# Altium PCB Coordinator5-10.21.PcbDoc (part 2 of 2)
Units mm, origin at the board's own origin, x right, y up, seen from the top; angles counter-clockwise.
Board outline 176.26 x 127.25 mm, 2 copper layers (Top Layer, Bottom Layer); 117 components, 155 nets, 547 pads, 228 vias.
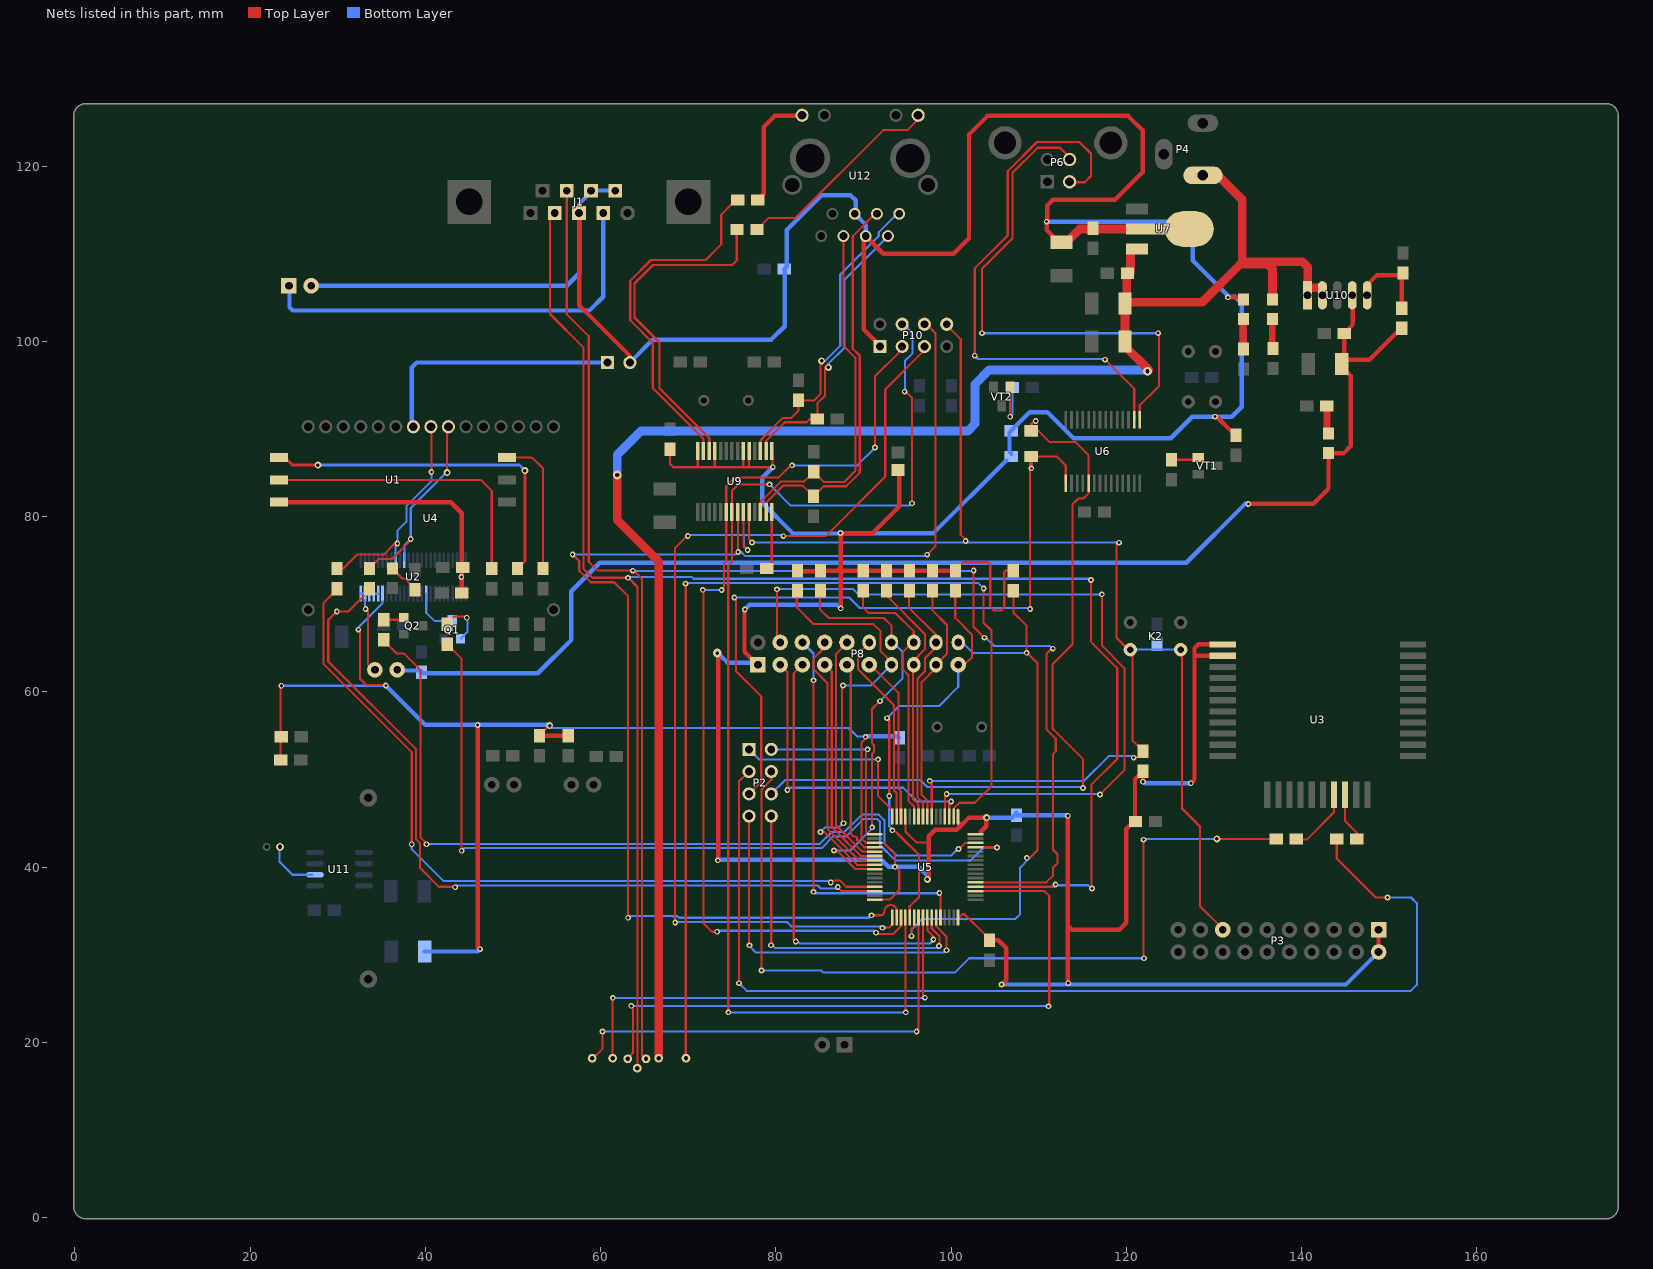
[diagram p2: the nets of this part, all layers, seen from the top]

## Via types
v1: diameter 0.65, hole 0.35, Top Layer to Bottom Layer, 208 vias
v2: diameter 0.8, hole 0.4, Top Layer to Bottom Layer, 14 vias
v3: diameter 1, hole 0.5, Top Layer to Bottom Layer, 5 vias
v4: diameter 1, hole 0.4, Top Layer to Bottom Layer, 1 vias

## Nets (pads, with @x,y where several pads share a name; then routed paths per layer and width w, separated by ;. In a path a pad name is that pad's centre, name@x,y a point inside that pad or via, vN(x,y) a via of type N, cw(c..) or ccw(c..) an arc to the next point about the centre after c; other vN are vias at no path point) (continued)
NetDS1_1: DS1.1 R15.1 | length 3.8
  Top Layer w0.24: DS1.1@36.254,74.072 37.397,72.929 37.651,72.929 38.54,72.04 38.82,72.04 R15.1@38.82,71.659
NetDS2_2: DS2.2 R26.2 | length 3.5
  Top Layer w0.762: DS2.2@136.652,102.557 136.652,99.078 R26.2@136.677,99.052
NetDS3_2: DS3.2 R24.2 | length 2.9
  Top Layer w0.762: R24.2@142.875,92.601 142.875,89.934 DS3.2@143.053,89.756
NetDS4_2: DS4.2 R25.2 | length 3.2
  Top Layer w0.762: R25.2@133.223,99.433 133.35,99.56 DS4.2@133.35,102.557
NetP1_1: P1.1 U4.24 | length 28.9
  Bottom Layer w0.5: U4.24@38.456,90.696 38.456,97.02 39.014,97.579 P1.1@60.808,97.579
NetP6_2: P6.2 U6.16 | length 62.1
  Top Layer w0.254: v1(102.692,98.367) 102.692,108.323 106.451,112.083 106.451,119.398 109.804,122.751 114.63,122.751 115.951,121.43 115.951,118.864 115.24,118.153 P6.2@113.97,118.153 ; v1@117.577,97.884 120.882,94.579 U6.16@120.882,91.065
  Bottom Layer w0.254: v1(102.692,98.367) 103.073,97.986 117.475,97.986 v1(117.551,97.909)
NetP6_3: P6.3 U6.15 | length 58.4
  Top Layer w0.254: v1(103.53,100.932) 103.53,108.273 107.01,111.752 107.01,119.238 109.871,122.099 112.411,122.099 P6.3@113.208,121.303 ; U6.15@121.532,91.065 121.532,92.695 123.723,94.887 123.723,100.83 v1(123.622,100.932)
  Bottom Layer w0.254: v1(103.53,100.932) v1(123.622,100.932)
NetQ1_2: Q1.2 R4.1 | length 5.3
  Top Layer w0.24: R4.1@42.503,67.722 42.503,67.782 43.332,68.611 v1@44.679,68.611
  Bottom Layer w0.24: Q1.2@44.027,66.071 44.044,66.071 44.806,66.833 v1@44.806,68.434
  other v1: 44.729,68.459
NetQ2_2: Q2.2 R11.1 | length 2.3
  Top Layer w0.24: R11.1@35.264,68.23 37.262,68.23 Q2.2@37.465,68.434
NetQ3_2: 
NetQ4_2: 
NetQ5_3: 
NetQ6_3: 
NetQ7_2: 
NetQ8_2: 
NetQ9_3: 
NetQ10_3: 
NetQ11_2: 
NetQ12_2: 
NetQ13_3: 
NetQ14_3: 
NetR5_1: R5.1 VT1.1 | length 3
  Top Layer w0.24: R5.1@125.147,86.493 127.788,86.493 VT1.1@128.042,86.747
NetR7_2: R7.2 U2.17 U4.23 | length 25.5
  Top Layer w0.24: R7.2@29.93,74.072 30.616,74.072 32.202,75.659 35.252,75.659 36.586,76.993 v1@36.889,76.993 ; v1(40.691,85.082) 40.691,90.442 U4.23@40.716,90.467
  Bottom Layer w0.24: U2.17@36.613,75.012 36.613,76.971 36.77,76.971 v1(36.812,76.929) 36.812,78.385 37.843,79.415 37.843,81.181 40.691,84.028 v1(40.691,85.082)
NetR9_2: R9.2 U2.15 U4.22 | length 23.8
  Top Layer w0.24: R9.2@33.359,73.818 R9.2@33.613,74.072 34.705,75.165 36.195,75.165 38.354,77.324 v1@38.354,77.476 ; v1@38.333,77.455 v1(38.337,77.451) ; v2(42.494,85.006) 42.494,90.01 U4.22@42.596,90.112
  Bottom Layer w0.24: U2.15@37.613,75.012 37.613,76.727 v1(38.337,77.451) 38.337,80.976 42.367,85.006 v2(42.494,85.006)
NetR12_2: R12.2 U3.19 | length 5.3
  Top Layer w0.24: U3.19@144.932,47.973 144.932,45.281 146.279,43.934 R12.2@146.279,43.223
NetR13_2: R13.2 U3.18 | length 7.6
  Top Layer w0.24: R13.2@139.395,43.147 140.564,43.147 143.688,46.271 U3.18@143.688,48.26
NetR14_1: R14.1 VT2.1 | length 6.8
  Top Layer w0.24: v1(106.732,91.395) VT2.1@106.732,94.748
  Bottom Layer w0.24: v1(106.732,91.395) 106.986,91.649 R14.1@106.986,94.748
NetR21_1: R21.1 U9.27 | length 40.1
  Top Layer w0.254: U9.27@71.736,87.491 71.755,87.51 71.755,88.892 65.964,94.684 65.964,99.814 63.373,102.405 63.373,106.901 65.761,109.289 71.984,109.289 73.762,111.067 73.762,114.445 R21.1@74.981,115.664
NetR21_2: R21.2 U12.12 | length 13.2
  Top Layer w0.5: R21.2@77.927,116.147 78.613,116.832 78.613,124.452 79.883,125.722 U12.12@82.702,125.722
NetR22_1: R22.1 U9.26 | length 38.7
  Top Layer w0.254: U9.26@72.386,87.491 72.386,88.98 66.726,94.64 66.726,99.865 63.881,102.71 63.881,106.596 65.989,108.704 75.032,108.704 75.54,109.212 R22.1@75.54,112.565
NetR22_2: R22.2 U12.9 | length 23.4
  Top Layer w0.24: R22.2@77.851,112.743 79.197,114.089 82.245,114.089 92.253,124.097 94.996,124.097 U12.9@96.114,125.214
NetR23_1: R23.1 R27.2 U10.5 | length 8
  Top Layer w0.5: U10.5@147.574,106.545 148.59,107.561 151.409,107.561 R23.1@151.409,103.777
NetR30_2: R30.2 U9.14 | length 6.2
  Top Layer w0.254: R30.2@79.324,74.44 79.536,74.652 U9.14@79.536,80.541
NetR37_1: 
NetR38_1: 
NetR39_1: 
NetR40_1: 
NetR47_1: 
NetR48_1: 
NetR49_1: 
NetR50_1: 
NetR57_1: 
NetR58_1: 
NetR59_1: 
NetR60_1: 
NetS1_1: S1.1 U2.26 U2.27 U2.28 U2.29 U2.30 | length 10.8
  Top Layer w0.24: v1(33.198,69.45) 33.206,69.45 33.452,69.204 33.452,63.159 34.222,62.388 34.248,62.388 S1.1@34.248,62.515
  Bottom Layer w0.24: U2.26@32.613,71.212 32.613,71.202 U2.27@33.113,71.202 ; U2.27@33.113,71.212 U2.27@33.113,71.202 ; U2.27@33.122,70.491 33.122,69.526 v1(33.198,69.45) ; U2.28@33.613,71.202 U2.27@33.113,71.202 ; U2.28@33.613,71.212 33.613,71.228 U2.29@34.113,71.228 ; U2.29@34.113,71.202 34.613,71.202 U2.30@34.613,71.212
NetU11_2: U11.2 Y3.1 | length 6
  Bottom Layer w0.24: Y3.1@23.52,42.233 23.368,42.08 23.368,40.607 24.841,39.134 U11.2@27.102,39.134
NRST: C9.2 K2.2 K2.3 P3.15 P10.8 R18.2 U5.7 U9.10 | length 164.9
  Top Layer w0.24: U9.10@76.936,80.541 76.936,77.438 v1@77.292,77.081 ; v1(97.561,49.853) 97.587,49.853 97.782,49.658 U5.7@97.782,45.771 ; P10.8@99.441,101.897 101.092,100.246 101.092,77.92 101.651,77.361 101.6,77.31 101.6,77.259 v1(101.651,77.208) ; v1(119.151,77.031) 118.872,76.751 118.872,66.159 120.701,64.331 120.701,54.425 R18.2@121.895,53.231 ; v1@120.777,52.57 121.361,52.57 121.691,52.901 R18.2@121.691,53.078 ; K2.3@126.213,64.534 126.34,64.407 126.34,46.703 128.397,44.646 ; 128.422,44.62 128.397,44.646 ; P3.15@130.48,33.47 128.397,35.552 128.397,44.646
  Bottom Layer w0.24: v1(77.267,77.056) 77.292,77.031 v1(119.151,77.031) ; v1(97.561,49.853) 115.164,49.853 117.983,52.672 120.65,52.672 v1(120.828,52.494) ; K2.2@120.447,64.815 K2.3@126.187,64.815 126.21,64.815 K2.3@126.213,64.813
PA0: P8.11 U5.14 | length 18.7
  Top Layer w0.24: P8.11@90.653,63.1 90.781,63.1 93.977,59.904 93.977,48.96 94.252,48.685 U5.14@94.252,45.955
PA1: P8.12 U5.15 | length 22
  Top Layer w0.24: 89.377,64.37 89.377,62.576 89.375,62.575 93.483,58.467 93.483,48.756 93.758,48.481 U5.15@93.758,45.955 ; 89.384,64.37 P8.12@90.653,65.64
PA4: P8.9 U5.20 | length 23.2
  Top Layer w0.24: P8.9@88.189,63.379 88.544,63.023 88.544,43.808 88.844,43.508 89.099,43.508 89.283,43.324 89.283,43.068 90.079,42.272 U5.20@91.289,42.272
PA5: P8.10 U5.21 | length 26.8
  Top Layer w0.24: P8.10@87.941,65.467 P8.10@88.113,65.64 ; P8.10@87.986,65.423 86.85,64.287 86.85,62.577 86.865,62.562 86.865,44.787 88.038,43.614 88.039,43.614 88.789,42.865 88.789,42.864 89.875,41.778 U5.21@91.035,41.778
PA6: P8.7 U5.22 | length 24.8
  Top Layer w0.24: P8.7@85.573,63.1 86.371,62.302 86.371,44.582 87.833,43.12 87.835,43.12 88.295,42.66 88.295,42.659 89.67,41.284 90.88,41.284 U5.22@90.908,41.256
PA7: P8.8 U5.23 | length 28.8
  Top Layer w0.24: 84.303,62.573 84.303,63.823 85.32,64.84 85.32,65.386 P8.8@85.573,65.64 ; 84.311,62.576 85.877,61.01 85.877,44.378 87.629,42.626 87.63,42.626 87.801,42.456 87.801,42.454 89.485,40.771 90.694,40.771 U5.23@90.703,40.762
PA8: P8.5 U5.41 | length 50.4
  Top Layer w0.24: v1@82.272,31.553 82.043,31.781 82.043,62.109 P8.5@83.033,63.1 ; U5.41@97.282,34.271 97.282,32.799 97.917,32.163 v1@97.917,31.832
  Bottom Layer w0.24: v1@82.48,31.548 82.729,31.299 97.587,31.299 v1@97.93,31.642
  other v1: 82.272,31.527 97.968,31.756
PA11: P8.6 U5.44 | length 45.6
  Top Layer w0.254: v1(84.304,37.192) v1(84.304,61.322) ; v1(98.655,37.065) 98.782,36.938 U5.44@98.782,34.779
  Bottom Layer w0.254: P8.6@83.033,65.64 84.304,64.37 ; v1@84.303,61.436 84.303,64.369 ; v1@84.329,37.192 84.49,37.031 98.621,37.031 v1(98.655,37.065)
PB8: R4.2 U5.61 | length 92.8
  Top Layer w0.24: R4.2@42.503,65.436 42.503,65.414 44.145,63.772 v1(44.145,41.877) ; U5.61@103.33,42.295 103.354,42.271 105.182,42.271 v1@105.258,42.195
  Bottom Layer w0.24: v1(44.145,41.877) 44.439,42.17 85.218,42.17 86.567,43.519 88.027,43.519 90.018,45.509 91.542,45.509 91.886,45.165 91.886,42.536 93.637,40.785 102.25,40.785 103.711,42.246 v1@105.131,42.246
  other v1: 105.232,42.246
PB9: R11.2 U5.62 | length 93
  Top Layer w0.24: R11.2@35.594,65.513 36.712,64.395 37.55,64.395 39.175,62.769 ; 39.167,62.781 39.472,62.476 39.472,43.376 v1@40.157,42.69 ; v1@100.914,42.068 101.616,42.771 U5.62@102.782,42.771
  Bottom Layer w0.24: v1@40.03,42.664 85.014,42.664 86.362,44.013 87.823,44.013 89.813,46.003 91.746,46.003 92.38,45.37 92.38,42.741 93.791,41.329 99.997,41.329 100.554,41.886
  other v1: 100.838,42.068 40.132,42.614
PB12: P10.5 U5.33 U9.9 | length 118.4
  Top Layer w0.24: v1(68.504,33.698) 68.504,76.446 69.926,77.869 69.952,77.843 v1(69.952,77.793) ; U9.9@76.286,80.541 76.286,76.767 v1@76.708,76.345 ; v1(80.848,77.767) 85.674,77.767 92.481,84.574 92.481,94.506 96.774,98.798 P10.5@96.774,99.179 ; v1@92.228,33.102 92.914,33.102 93.282,33.47 U5.33@93.282,34.271
  Bottom Layer w0.24: v1@68.58,33.724 81.305,33.724 ; v1(69.952,77.793) 70.053,77.894 80.772,77.894 v1@80.848,77.818 ; 76.352,77.767 76.352,76.573 v1@76.657,76.269 ; 81.28,33.698 81.735,33.243 v1@92.062,33.243
  other v1: 92.178,33.077 76.784,76.192
PB13: P10.6 U5.34 U9.8 | length 150.8
  Top Layer w0.24: v1(56.82,75.684) 57.563,74.941 57.563,73.826 58.873,72.516 61.537,72.516 63.144,70.909 v1(63.144,34.232) ; U9.8@75.59,80.282 75.692,80.18 v1(75.692,75.964) ; v1(90.907,34.511) 91.923,34.511 ccw(c91.923,34.968) 92.38,34.968 cw(c93.091,34.968) 93.091,35.679 93.167,35.679 cw(c93.167,35.065) 93.782,35.065 U5.34@93.782,34.271 ; P10.6@97.206,101.948 98.196,100.957 98.196,76.599 v1(97.257,75.659)
  Bottom Layer w0.24: v1(56.82,75.684) 75.413,75.684 v1(75.692,75.964) 76.024,75.964 76.495,75.493 97.091,75.493 v1(97.257,75.659) ; v1(63.144,34.232) 63.144,34.449 68.123,34.449 68.175,34.397 68.793,34.397 68.959,34.232 90.627,34.232 v1(90.907,34.511)
PB14: P10.3 U5.35 U9.6 | length 107.7
  Top Layer w0.24: v1(71.653,71.646) 71.755,71.646 71.806,71.595 71.755,71.544 71.755,33.571 72.695,32.631 v1(73.304,32.631) ; v1@73.787,71.62 74.067,71.901 74.067,74.632 74.336,74.901 U9.6@74.336,80.541 74.336,83.46 75.325,84.448 80.29,84.448 v1@81.737,85.895 ; v1(91.313,87.876) 91.313,96.004 P10.3@94.31,99.002 ; v1@91.568,32.569 91.759,32.378 93.409,32.378 94.282,33.25 U5.35@94.282,34.271
  Bottom Layer w0.24: v1(71.653,71.646) 73.635,71.646 v1@73.66,71.62 ; v1@73.406,32.708 73.448,32.749 91.235,32.749 91.441,32.543 v1(91.416,32.518) ; v1(81.864,85.844) 89.281,85.844 v1(91.313,87.876)
  other v1: 73.812,71.62
PB15: P10.4 U5.36 U9.7 | length 134.1
  Top Layer w0.24: v1@74.561,23.487 74.561,74.428 ; 74.574,74.389 74.986,74.801 U9.7@74.986,80.541 74.986,82.929 75.743,83.685 v1@79.019,83.685 ; v1@94.742,94.252 94.838,94.252 95.529,93.56 v1(95.529,81.526) ; v1@94.78,23.386 94.78,34.269 U5.36@94.782,34.271
  Bottom Layer w0.24: v1(74.574,23.437) 94.717,23.437 v1@94.818,23.335 ; v1(79.273,83.685) 81.712,81.247 95.25,81.247 v1(95.529,81.526) ; P10.4@94.615,101.923 95.606,100.932 95.606,98.646 94.717,97.757 94.717,94.328 v1@94.793,94.252
  other v1: 94.818,23.437 94.691,94.252
PC0: P8.17 R35.1 U5.8 | length 27.9
  Top Layer w0.24: 96.635,48.265 96.635,61.105 98.274,62.744 P8.17@98.273,63.1 ; 96.647,48.252 97.282,47.617 97.282,46.09 97.252,46.059 U5.8@97.252,45.831 ; R35.1@97.851,71.615 97.851,69.312 99.53,67.633 99.53,64.357 P8.17@98.273,63.1
PC1: P8.18 R36.1 U5.9 | length 28
  Top Layer w0.24: R36.1@95.212,71.504 95.212,69.563 98.265,66.51 98.265,65.075 96.997,63.806 96.997,62.331 96.141,61.476 96.141,47.971 96.785,47.327 96.785,46.292 96.752,46.258 U5.9@96.752,45.955
PC2: P8.15 R37.1 U5.10 | length 27.6
  Top Layer w0.24: R37.1@92.692,71.382 92.692,70.914 97.008,66.599 97.008,64.861 95.725,63.579 P8.15@95.725,63.066 ; P8.15@95.733,63.1 95.647,63.013 95.647,47.767 96.291,47.122 96.291,46.496 U5.10@96.258,46.463
PC3: P8.16 R38.1 U5.11 | length 31.1
  Top Layer w0.24: R38.1@89.962,71.585 89.962,69.614 90.581,68.994 93.645,68.994 95.738,66.901 P8.16@95.738,65.585 ; P8.16@95.58,65.626 94.47,64.516 94.47,62.577 95.115,61.932 95.115,47.6 95.764,46.951 95.764,46.258 95.782,46.24 U5.11@95.782,45.771 ; U5.11@95.759,46.539 U5.11@95.764,46.543
PC4: P8.13 R39.1 U5.24 | length 50.4
  Top Layer w0.24: R39.1@82.385,71.471 82.385,69.647 84.299,67.733 91.126,67.733 91.951,66.909 91.951,64.618 93.19,63.378 P8.13@93.19,63.028 ; v1@85.142,44.05 85.155,44.036 85.521,44.036 89.289,40.268 91.279,40.268 U5.24@91.282,40.271 ; v1(87.655,60.737) 87.732,60.737 87.554,60.661 87.554,45.091 v1@87.706,44.989 ; P8.13@93.236,63.028 P8.13@93.236,63.287
  Bottom Layer w0.24: v1(85.091,44.024) 85.574,44.507 87.147,44.507 v1@87.681,45.04 ; v1@87.706,60.737 87.732,60.712 90.806,60.712 P8.13@93.193,63.1
  other v1: 87.706,45.015
PC5: P8.14 R40.1 U5.25 | length 46.9
  Top Layer w0.24: R40.1@85.057,71.6 85.057,69.39 86.017,68.43 92.329,68.43 93.175,67.584 P8.14@93.175,65.585 ; v1@86.716,41.979 86.879,41.979 89.081,39.777 89.081,39.771 U5.25@91.282,39.771 ; v1(90.983,44.544) 90.971,44.556 90.971,52.954 91.175,53.158 91.175,53.941 90.971,54.146 90.971,58.045 v1(91.872,58.946)
  Bottom Layer w0.24: v1(86.639,41.902) 88.468,41.902 v1@91.008,44.442 ; v1(91.872,58.946) 94.463,61.537 94.463,64.559 93.574,65.448 P8.14@93.574,65.524
PC6: P8.19 R41.1 U5.37 | length 47.7
  Top Layer w0.24: v1(92.686,57.004) 92.813,57.004 92.94,56.877 v1(92.94,48.114) ; v1@93.448,44.278 94.108,43.618 ; 94.51,43.216 94.108,43.618 ; U5.37@95.282,34.271 95.282,35.541 96.33,36.589 96.33,41.433 94.108,43.618 ; R41.1@100.467,71.514 100.467,68.445 102.385,66.528 102.385,63.967 101.455,63.038 P8.19@100.889,63.038
  Bottom Layer w0.24: v1(92.686,57.004) 94.069,58.387 98.628,58.387 100.813,60.571 P8.19@100.813,63.162 ; v1(92.94,48.114) 92.94,44.634 v1@93.333,44.24
  other v1: 93.295,44.202
PC7: P8.20 R42.1 U5.38 | length 62.9
  Top Layer w0.24: v1@95.479,32.2 95.479,32.949 95.782,33.252 U5.38@95.782,34.271 ; R42.1@107.112,71.519 107.112,69.027 108.61,67.528 v1(108.61,64.458) ; v1(108.636,41.064) 108.993,41.064 109.857,41.928 109.857,63.288 v1@108.661,64.483
  Bottom Layer w0.24: v1(95.479,32.123) v1@95.479,32.149 ; v1@95.479,32.276 95.479,32.86 96.723,34.105 107.34,34.105 107.874,34.638 107.874,39.947 108.814,40.886 v1(108.636,41.064) ; P8.20@101.321,65.601 102.464,64.458 v1(108.61,64.458)
PC8: pad.0 U5.39 | length 52.6
  Top Layer w0.24: pad.0@59.07,18.133 60.239,19.301 v1@60.239,21.295 ; v1@96.037,21.303 96.28,21.546 96.28,34.269 U5.39@96.282,34.271
  Bottom Layer w0.24: v1(60.223,21.252) v1(96.063,21.252)
PC9: pad.1 U5.40 | length 51.7
  Top Layer w0.24: pad.1@61.366,18.125 v1@61.366,25.113 ; U5.40@96.788,34.333 96.788,25.404 v1@96.901,25.291
  Bottom Layer w0.24: v1(61.392,25.088) 96.952,25.088 v1@96.977,25.062
  other v1: 97.003,25.113
PC10: pad.2 U5.51 | length 75.1
  Top Layer w0.24: pad.2@63.066,18.181 63.703,18.819 63.703,23.97 v1(63.5,24.173) ; U5.51@102.782,37.271 110.651,37.271 111.189,36.733 111.189,24.212 v1(111.1,24.122)
  Bottom Layer w0.24: v1(63.5,24.173) v1@110.998,24.173
PC11: J1.4 pad.3 U5.52 | length 207.7
  Top Layer w0.24: U5.52@102.782,37.771 111.641,37.771 v1(111.887,38.016) ; v1@115.813,72.625 v1(115.951,72.763) ; v1@115.926,72.636 115.976,72.586 115.976,65.677 118.948,62.705 118.948,52.342 116.002,49.395 116.002,37.686 v1@116.027,37.661 ; v1@115.976,37.661 v1(116.078,37.559)
  Top Layer w0.254: J1.4@54.483,114.14 54.229,113.886 54.229,103.116 58.064,99.281 58.064,74.033 59.08,73.017 v1(63.119,73.017) ; v1@63.144,73.043 64.206,71.981 pad.3@64.206,17.01
  Bottom Layer w0.24: v1@111.989,37.94 115.646,37.94 v1@116.027,37.559
  Bottom Layer w0.254: v1@63.144,73.119 70.409,73.119 70.619,72.909 v1@115.799,72.909
PC12: J1.8 pad.4 U5.53 | length 196.6
  Top Layer w0.24: J1.8@56.032,116.858 56.134,116.756 56.134,103.091 58.649,100.576 58.649,74.846 59.665,73.83 v1(63.678,73.83) ; v1@63.754,73.856 64.719,72.89 64.719,18.57 pad.4@65.199,18.09 ; v1@102.54,73.906 102.54,67.455 v1(103.81,66.185) ; U5.53@102.749,38.27 110.871,38.27 111.633,39.032 111.633,39.961 112.14,40.468 112.14,41.457 111.633,41.964 111.633,52.926 111.938,53.231 111.938,54.653 110.896,55.695 110.896,64.381 v1@111.468,64.953
  Bottom Layer w0.24: v1@63.551,73.805 63.576,73.779 102.54,73.779 v1@102.591,73.83 ; v1@103.95,66.197 104.888,65.259 111.264,65.259 v1@111.531,64.991
  other v1: 111.608,64.94 102.565,73.856
PC13: pad.6 U5.2 | length 117.6
  Top Layer w0.24: v1@69.672,72.255 69.723,72.205 pad.6@69.723,18.12 ; U5.2@100.312,45.938 100.312,46.715 100.95,47.353 102.708,47.353 104.597,49.243 104.597,67 103.69,67.907 103.69,71.73 v1@103.835,71.874
  Bottom Layer w0.24: v1@69.774,72.611 69.977,72.408 103.099,72.408 v1(103.708,71.798)
  other v1: 69.698,72.357
PC14: P8.3 U5.3 | length 35.5
  Top Layer w0.24: P8.3@80.772,62.807 81.305,62.273 v1(81.305,48.811) ; U5.3@99.782,45.771 99.782,47.298 99.974,47.49 v1(100,47.49)
  Bottom Layer w0.24: v1(81.305,48.811) 81.559,49.065 94.553,49.065 96.128,47.49 v1(100,47.49)
PC15: P8.4 U5.4 | length 88.5
  Top Layer w0.24: v1(80.137,71.697) 80.137,66.236 P8.4@80.391,65.982 ; U5.4@99.282,45.771 99.282,48.322 99.365,48.405 99.441,48.405 v1(99.492,48.354) ; v1(116.992,48.303) 119.761,51.072 119.761,62.705 117.221,65.245 117.221,71.112 v1(117.196,71.138)
  Bottom Layer w0.24: v1(80.137,71.697) 80.162,71.722 88.824,71.722 89.447,71.099 117.157,71.099 v1(117.196,71.138) ; v1(99.492,48.354) 99.517,48.329 100.14,48.329 ; 100.14,48.329 v1@116.992,48.329
REMOTE: J1.2 P7.1 | length 47.9
  Bottom Layer w0.5: P7.1@24.511,105.961 24.511,103.878 24.867,103.523 58.725,103.523 60.3,105.098 J1.2@60.3,114.343
SIM-CLK: R1.1 U1.3 | length 40.3
  Top Layer w0.24: U1.3@23.319,86.731 23.935,86.731 U1.3@23.935,86.772
  Top Layer w0.305: U1.3@23.935,86.772 24.824,85.883 v2(27.745,85.883) ; R1.1@50.504,74.072 51.384,74.953 51.384,85.232 v2(51.367,85.248)
  Bottom Layer w0.305: v2(27.745,85.883) 50.732,85.883 v2(51.367,85.248)
SIM-IO: R2.1 U1.6 | length 16
  Top Layer w0.24: U1.6@49.319,86.731 52.196,86.731 53.425,85.502 R2.1@53.425,74.072
SIM-RST: R3.1 U1.2 | length 33.6
  Top Layer w0.24: U1.2@23.319,84.191 46.329,84.191 47.583,82.937 R3.1@47.583,74.072
SIM-VCC: C4.2 R8.2 U1.1 U2.2 | length 32.5
  Top Layer w0.24: R8.2@44.154,71.278 R8.2@44.154,71.473 ; C4.2@44.154,74.199 C4.2@44.154,74.555
  Top Layer w0.5: U1.1@23.319,81.651 42.891,81.651 44.171,80.372 C4.2@44.171,74.555 ; C4.2@44.154,74.199 44.154,71.473 R8.2@44.221,71.405
  Bottom Layer w0.24: v1(44.113,73.107) U2.2@44.113,75.012
SWITCH1: 
SWITCH2: 
SWITCH3: 
SWITCH4: 
SWITCH5: 
SWITCH6: 
TERM_ON: Q1.3 U2.41 | length 5.5
  Bottom Layer w0.24: U2.41@40.113,71.212 40.113,69.018 41.028,68.103 Q1.3@43.074,68.103
TPIN_N: R34.2 U9.12 U12.6 | length 41.8
  Top Layer w0.24: U9.12@78.236,80.541 78.236,81.692 78.392,81.848 78.427,81.848 80.606,84.027 83.247,84.027 R34.2@84.328,85.108 85.478,83.958 87.833,83.958 89.078,85.202 89.078,98.144 87.711,99.511 U12.6@87.711,112.006
TPIN_P: R33.2 U9.13 U12.3 | length 45.4
  Top Layer w0.24: U9.13@78.886,80.541 78.886,81.609 80.81,83.533 83.083,83.533 R33.2@84.303,82.314 85.453,83.464 88.038,83.464 89.572,84.998 89.572,98.457 89.535,98.494 89.427,98.494 88.77,99.151 88.77,112.009 91.308,114.546 U12.3@91.531,114.546
TPOUT_N: R32.2 U9.16 U12.2 | length 32.5
  Top Layer w0.24: U9.16@78.886,87.491 78.886,88.652 81.006,90.772 83.49,90.772 83.845,91.128 R32.2@84.734,91.128 84.734,92.925 85.462,93.652 85.606,93.796 85.606,97.012 85.623,97.029 v2(85.979,97.029)
  Bottom Layer w0.24: v2(85.979,97.029) 85.979,97.425 87.845,99.29 87.845,107.06 U12.2@92.791,112.006
TPOUT_P: R31.2 U9.17 U12.1 | length 35.6
  Top Layer w0.24: U9.17@78.236,87.491 78.236,88.652 78.392,88.808 78.392,88.857 80.801,91.266 81.763,91.266 82.575,92.079 R31.2@82.575,93.261 84.372,93.261 85.112,94.001 85.112,97.297 85.234,97.418 v2(85.234,97.774)
  Bottom Layer w0.24: v2(85.234,97.774) 85.63,97.774 87.351,99.495 87.351,107.622 91.742,112.014 91.742,112.441 93.848,114.546 U12.1@94.071,114.546
UART1_RX: P2.7 U5.43 | length 42.7
  Top Layer w0.24: v1@76.938,30.994 P2.7@76.938,45.828 76.938,44.842 ; U5.43@98.282,34.271 98.282,33.247 99.492,32.036 v1@99.492,30.726
  Bottom Layer w0.24: v1@76.963,31.019 77.714,30.269 99.187,30.269 v1@99.416,30.498
  other v1: 99.466,30.523 76.987,31.082
UART1_TX: P2.8 U5.42 | length 40.4
  Top Layer w0.24: U5.42@97.776,34.265 U5.42@97.782,34.271 97.782,33.01 98.667,32.125 98.667,31.248 v1@98.577,31.158
  Top Layer w0.254: v1@79.478,31.096 P2.8@79.478,45.828 79.478,43.011
  Bottom Layer w0.24: v1@79.554,31.146 79.935,30.765 98.464,30.765 v1@98.628,30.93
  other v1: 98.603,31.006 79.452,31.096
UART2_RX_W: P2.2 U5.17 | length 20.6
  Top Layer w0.24: v1@90.273,53.448 90.273,44.05 U5.17@90.527,43.796
  Bottom Layer w0.24: P2.2@79.478,53.448 v1@90.273,53.448
  other v1: 90.476,53.448
UART2_TX_W: P2.1 U5.16 | length 22.7
  Top Layer w0.24: v1(91.67,52.305) 91.67,48.114 93.264,46.52 93.264,45.75 93.312,45.702 U5.16@93.312,45.447
  Bottom Layer w0.24: P2.1@76.938,53.448 78.081,52.305 v1(91.67,52.305)
UART3_RX_G: R9.1 U5.30 | length 90.8
  Top Layer w0.24: R9.1@33.257,71.228 31.2,69.17 v1(29.904,69.17) 28.931,68.196 28.931,63.467 38.95,53.448 38.95,43.186 39.395,42.741 39.395,39.921 41.554,37.762 v1@43.459,37.762 ; v1@87.109,37.673 87.512,37.271 U5.30@90.602,37.271
  Bottom Layer w0.24: v1(43.409,37.711) v1@43.586,37.889 ; v1@43.51,37.891 84.809,37.891 85.154,37.546 86.855,37.546 v1@86.995,37.686 ; v1@87.07,37.61 v1@87.134,37.546
  other v1: 87.071,37.737
UART3_TX_G: R7.1 U5.29 | length 89
  Top Layer w0.24: R7.1@29.701,71.456 28.372,70.127 28.372,63.213 38.456,53.129 v1(38.456,42.614) ; R7.1@29.93,71.786 29.93,71.659 R7.1@30.031,71.659 ; v1@86.487,38.346 86.613,38.472 87.327,38.472 88.028,37.771 U5.29@91.282,37.771
  Bottom Layer w0.24: v1(38.456,42.614) 38.456,42.055 42.1,38.411 v1@86.411,38.411
  other v1: 86.258,38.245
UART_RXD: P2.3 R12.1 | length 125
  Top Layer w0.24: v1(75.794,26.764) 75.794,49.802 P2.3@76.606,50.615 ; R12.1@143.993,43.223 143.993,40.988 148.438,36.543 v1(149.784,36.543)
  Bottom Layer w0.24: v1(75.794,26.764) 76.67,25.887 152.438,25.887 153.137,26.586 153.137,35.883 152.476,36.543 v1(149.784,36.543)
UART_RXD_USB: C12.2 P2.6 R19.2 U6.5 | length 88.5
  Top Layer w0.24: v1(109.653,90.913) 109.448,90.913 109.145,90.61 C12.2@109.145,89.795 109.932,89.795 111.202,88.525 114.158,88.525 115.682,87.001 U6.5@115.682,83.826 115.682,82.667 115.088,82.073 114.504,82.073 113.844,81.413 113.844,65.449 111.582,63.188 111.582,55.796 115.062,52.316 v1@115.062,49.04
  Bottom Layer w0.24: P2.6@79.478,48.368 81.064,49.954 96.471,49.954 97.284,49.141 114.974,49.141 v1@114.986,49.13 ; R19.2@109.145,89.795 109.145,90.557 109.5,90.913 v1(109.653,90.913)
  other v1: 115.05,49.028
UART_TXD: P2.4 R13.1 | length 96.5
  Top Layer w0.24: v1(78.359,28.212) 78.354,28.217 78.354,48.833 79.478,49.957 P2.4@79.478,50.908 ; v1(121.945,43.147) 121.945,29.66 v1(121.996,29.609) ; v2(130.327,43.223) R13.1@137.109,43.223
  Bottom Layer w0.24: v1(78.359,28.212) 85.168,28.212 85.41,27.97 100.418,27.97 102.057,29.609 v1(121.996,29.609) ; v1(121.945,43.147) 121.869,43.223 v2(130.327,43.223)
UART_TXD_USB: C13.2 P2.5 R20.2 U6.1 | length 85
  Top Layer w0.24: v1(75.26,70.77) 75.438,70.77 75.438,62.388 78.335,59.492 78.335,49.765 P2.5@76.938,48.368 ; v1(109.017,69.461) C13.2@109.017,86.733 ; v1(109.145,85.502) C13.2@109.145,86.874 112.04,86.874 113.082,85.833 U6.1@113.082,83.826
  Bottom Layer w0.24: v1(75.26,70.77) 88.378,70.77 89.573,69.575 108.903,69.575 v1(109.017,69.461) ; v1(109.145,85.502) R20.2@109.145,86.874
VCC: C10.1 CA2.1 D1.2 DS2.1 P4.3 pad.5 U7.3 U10.1 U10.2 | length 199.3
  Top Layer w1: v3(61.9,84.752) 61.9,79.621 66.65,74.872 pad.5@66.65,18.318 ; D1.2@119.837,99.968 119.837,99.459 v3@122.555,96.741 ; CA2.1@119.837,104.31 119.837,100.068 D1.2@119.863,100.043 ; U7.3@120.574,110.584 120.472,110.482 120.472,107.815 120.04,107.384 120.04,104.463 128.651,104.463 133.02,108.831 136.068,108.831 136.652,108.247 DS2.1@136.652,104.767 ; P4.3@128.727,118.941 130.429,118.941 133.223,116.147 133.223,108.933 ; 133.528,109.085 140.081,109.085 140.691,108.476 U10.1@140.691,106.241 ; U10.1@140.691,106.11 U10.2@142.391,106.11
  Bottom Layer w1: v3(61.9,84.752) 61.9,87.064 64.592,89.756 101.879,89.756 102.718,90.594 102.718,95.115 104.343,96.741 122.25,96.741 v3(122.403,96.589)
VCC3V3: C11.1 C14.1 C15.1 C16.1 C17.1 C23.1 C29.1 CA3.1 D2.1 DS4.1 J1.3 J1.6 J1.7 L1.1 P1.2 P3.1 P3.2 P7.2 P8.1 P10.1 R6.2 R16.2 R17.2 R18.1 R19.1 R20.1 R28.1 R29.1 R35.2 R36.2 R37.2 R38.2 R39.2 R40.2 R41.2 R42.2 U2.31 U3.1 U3.2 U5.1 U5.13 U5.19 U5.32 U5.48 U5.64 U7.2 U9.15 U9.19 U9.20 U9.25 U9.28 U12.4 U12.5 | length 771.5
  Top Layer w0.24: R28.1@23.495,52.266 23.495,60.394 23.571,60.47 v1(23.571,60.698) ; v1@32.534,66.935 32.534,61.528 33.274,60.788 v1@35.458,60.788 ; R16.2@52.934,55.107 R16.2@53.044,54.997 ; R16.2@53.45,55.48 v2@54.157,56.186 ; P8.1@77.598,63.455 P8.1@77.953,63.1 ; 89.777,43.273 89.777,54.196 90.272,54.691 v1@90.272,54.743 ; 89.808,43.242 90.279,42.771 92.284,42.771 93.574,41.481 v1@93.574,40.062 ; U5.32@91.898,36.301 92.987,36.301 94.082,37.395 94.082,39.63 v1@93.701,40.011 ; U5.13@94.782,45.771 94.782,44.075 96.026,42.83 97.434,42.83 ; U5.1@100.763,44.939 U5.1@100.763,45.004 ; U5.48@100.814,34.169 101.271,34.626 101.524,34.626 103.874,32.276 C16.1@103.886,32.276 ; v1@130.1,91.294 v1(130.1,91.408)
  Top Layer w0.254: C23.1@67.92,87.699 67.92,85.997 68.275,85.641 v1(79.654,85.641) ; 71.044,85.641 71.086,85.683 U9.28@71.086,87.491 ; 73,85.717 73.036,85.754 U9.25@73.036,87.491 ; 76.276,85.692 76.286,85.702 U9.20@76.286,87.491 ; 76.936,85.667 U9.19@76.936,87.491 ; 79.604,85.971 U9.15@79.604,87.013 ; R41.2@100.813,74.226 101.389,74.803 104.155,74.803 104.465,74.493 104.465,69.718 104.892,69.291 105.715,69.291 106.063,69.639 106.063,73.68 106.269,73.886 R42.2@107.02,73.886
  Top Layer w0.5: v1(45.974,56.228) 45.974,30.93 v1(46.253,30.65) ; R16.2@53.111,55.085 53.188,55.009 R17.2@56.312,55.009 ; J1.3@57.582,114.521 57.582,104.082 63.348,98.316 P1.2@63.348,97.579 ; v1@73.431,40.937 v4@73.431,64.28 ; v1@76.415,69.461 76.415,64.587 P8.1@77.572,63.43 ; R39.2@82.456,73.751 R40.2@85.082,73.751 ; R40.2@85.037,73.802 87.01,73.802 87.335,74.127 ; v1(87.401,69.538) 87.401,78.097 v1(87.376,78.123) 91.059,78.123 94.082,81.145 L1.1@94.082,85.184 ; 87.455,73.576 87.709,73.83 R41.2@100.482,73.83 ; U12.4@90.246,111.905 90.018,111.676 90.018,101.364 91.872,99.51 P10.1@91.872,99.408 ; U12.4@90.251,112.006 92.258,110 100.279,110 102.032,111.752 102.032,123.614 104.14,125.722 120.193,125.722 121.844,124.071 121.844,119.296 118.694,116.147 111.608,116.147 110.973,115.512 v1@110.973,113.861 ; v2@97.206,38.626 97.434,38.854 97.434,43.516 98.183,44.265 100.621,44.265 100.876,44.519 ; 100.914,44.939 100.914,44.558 101.981,45.624 v2@103.988,45.624 ; 103.378,44.041 104.004,44.667 v2@104.004,45.616 ; C16.1@104.369,31.666 105.385,31.666 106.274,30.777 106.274,27.094 v1@105.791,26.612 ; v1(110.896,113.657) 110.896,112.718 CA3.1@111.887,111.727 ; 113.309,33.343 113.792,32.86 119.202,32.86 119.99,33.647 119.99,44.366 C15.1@120.625,45.001 ; v1(113.309,45.865) 113.309,26.815 v1(113.36,26.764) ; C15.1@120.955,45.306 120.98,45.331 120.98,50.03 R18.1@121.895,50.945 v1(121.895,49.751) ; v1(127.356,49.573) 127.762,49.98 127.762,64.991 128.194,65.423 U3.1@130.15,65.423 ; 127.889,64.102 127.914,64.127 U3.2@130.996,64.127 ; v1(130.1,91.408) 130.301,91.408 R6.2@132.156,89.553 ; v1(131.572,105.021) DS4.1@133.172,105.021 ; P3.2@148.768,30.32 148.768,32.479 P3.1@148.819,32.53
  Top Layer w1: CA3.1@113.386,111.524 114.681,112.819 U7.2@120.65,112.819
  Bottom Layer w0.24: v1(23.571,60.698) 35.484,60.698 v1@35.535,60.648 ; v1(32.361,67.107) v1@32.436,67.182 ; v1@32.436,67.138 32.436,67.432 35.113,70.11 U2.31@35.113,70.385 ; v2@54.153,56.101 54.368,55.886 88.291,55.886 89.257,54.921 v1@90.246,54.921 ; P8.1@77.877,62.846 P8.1@77.928,62.896 ; v1@90.246,54.742 v1(90.246,54.87)
  Bottom Layer w0.5: P7.2@26.975,106.342 56.134,106.342 57.556,107.765 J1.3@57.556,114.445 ; v1(35.492,60.737) 39.976,56.253 v2@54.153,56.253 ; D2.1@39.929,30.372 45.976,30.372 v1(46.253,30.65) ; J1.3@57.532,114.642 57.532,115.665 59.08,117.213 J1.6@61.57,117.213 ; J1.3@57.582,114.267 J1.3@57.658,114.343 ; P1.2@63.348,97.579 65.964,100.195 79.477,100.195 81.001,101.719 C29.1@81.001,108.222 ; v1@73.457,40.861 92.024,40.861 92.849,40.036 v1(93.6,40.036) ; v4@73.646,64.166 74.473,63.34 77.434,63.34 77.674,63.1 P8.1@77.953,63.1 ; v1(76.454,69.411) 76.987,69.944 86.995,69.944 v1(87.401,69.538) ; v1(79.654,85.641) 78.435,84.422 78.435,81.577 81.94,78.072 v1@87.122,78.072 ; C29.1@80.975,108.247 81.255,108.527 81.255,112.718 85.217,116.68 88.519,116.68 89.103,116.096 U12.5@89.103,114.8 ; v1@87.427,78.123 97.993,78.123 R20.1@106.274,86.403 ; U12.5@88.991,114.546 90.272,113.266 U12.4@90.272,112.26 ; v1@90.195,54.933 93.878,54.933 C14.1@94.031,54.78 ; v1@93.574,39.986 93.624,40.036 96.252,40.036 97.358,38.931 97.358,38.6 v2(97.282,38.6) ; v2(104.038,45.65) 106.948,45.65 C17.1@107.239,45.941 ; v1(105.74,26.612) 145.059,26.612 P3.2@148.768,30.32 ; R20.1@106.884,87.153 106.656,87.382 106.656,89.592 R19.1@106.859,89.795 106.859,89.825 108.962,91.929 110.973,91.929 113.97,88.931 125.045,88.931 127.522,91.408 132.005,91.408 133.147,92.55 133.147,104.31 132.385,105.072 v1@131.648,105.072 ; C17.1@107.442,46.22 C17.1@107.442,45.916 113.259,45.916 v1(113.309,45.865) ; v1(110.896,113.657) 126.771,113.657 127.559,112.87 127.559,109.314 ; v1(121.895,49.751) 122.072,49.573 v1(127.356,49.573) ; 127.559,109.238 131.572,105.225 v1(131.572,105.021)
  other v1: 73.381,40.785
  other v2: 54.178,56.165
  other v4: 73.304,64.432
VCC4: C27.1 CA4.1 DS3.1 R10.2 R23.2 S1.2 U10.4 | length 149.3
  Top Layer w0.254: S1.2@36.762,62.388 36.889,62.515 S1.2@36.788,62.515
  Top Layer w0.5: v1(133.909,81.45) 141.326,81.45 143.053,83.177 DS3.1@143.053,87.267 ; DS3.1@143.205,87.216 144.755,87.216 145.593,88.054 145.593,96.055 144.882,96.766 CA4.1@144.882,96.868 ; CA4.1@144.551,97.427 145.009,97.884 147.701,97.884 150.952,101.135 R23.2@151.181,101.135 ; CA4.1@144.78,98.29 144.856,98.367 C27.1@144.856,100.881 144.856,100.932 145.791,101.866 145.791,102.12 145.821,102.151 U10.4@145.821,104.361
  Bottom Layer w0.24: S1.2@36.788,62.515 S1.2@37.118,62.515
  Bottom Layer w0.5: S1.2@37.118,62.439 39.404,62.439 R10.2@39.582,62.261 ; R10.2@39.522,62.121 52.832,62.121 56.642,65.931 56.642,71.493 59.893,74.745 126.822,74.745 133.528,81.45 v1(133.909,81.45)
pads on no net: J1.1 P3.17 P3.19 P6.5 P6.6 U1.5 U2.5 U2.7 U2.9 U2.10 U2.11 U2.12 U2.14 U2.16 U2.19 U2.20 U2.32 U2.33 U2.34 U2.35 U2.36 U2.37 U2.38 U2.39 U2.43 U2.44 U2.45 U2.46 U2.47 U2.48 U2.49 U2.50 U3.3 U3.4 U3.5 U3.6 U3.8 U3.9 U3.10 U3.11 U3.12 U3.13 U3.14 U3.16 U3.17 U3.20 U3.21 U3.22 U3.23 U3.24 U3.25 U3.26 U3.27 U3.28 U3.29 U4.1 U4.16 U4.17 U4.18 U4.19 U4.20 U4.21 U4.26 U4.27 U4.28 U4.29 U5.45 U6.2 U6.3 U6.6 U6.8 U6.9 U6.10 U6.11 U6.12 U6.14 U6.19 U6.22 U6.24 U6.27 U6.28 U9.3 U9.5 U11.3 U11.7 U12. U12.7

## Polygon pours and split planes (outlines as drawn)
GND on Top Layer "Bottom Overlay-No Net" (solid, pour order 6): 30.815,21.42 cw(c30.815,22.893) 29.342,22.893 29.342,23.655 ccw(c27.691,23.655) 27.691,25.306 21.57,25.306 cw(c21.57,26.779) 20.096,26.779 20.096,114.384 cw(c22.636,114.384) 22.636,116.924 26.319,116.924 30.51,116.898 32.542,117.178 34.981,118.143 37.013,119.616 38.435,121.318 39.121,122.537 39.629,123.756 39.985,125.23 40.086,126.195 cw(c40.823,126.195) 40.823,126.931 134.32,126.931 cw(c134.32,126.093) 135.158,126.093 135.438,124.442 136.098,122.512 136.835,121.343 137.825,120.073 138.994,118.981 140.391,118.092 142.118,117.33 143.769,117 145.318,116.873 152.557,116.873 cw(c152.557,114.333) 155.097,114.333 155.097,27.643 cw(c152.557,27.643) 152.557,25.103 150.805,25.103 ccw(c150.805,22.817) 148.519,22.817 cw(c147.198,22.817) 147.198,21.496 144.302,21.496
GND on Bottom Layer "Bottom Overlay-No Net" (solid, pour order 6): 30.81,21.43 cw(c30.81,22.903) 29.337,22.903 29.337,23.665 ccw(c27.686,23.665) 27.686,25.316 27.127,25.316 21.565,25.316 cw(c21.565,26.789) 20.091,26.789 20.091,114.394 cw(c22.631,114.394) 22.631,116.934 26.314,116.934 30.505,116.909 32.537,117.188 34.976,118.153 37.008,119.626 38.43,121.328 39.116,122.547 39.624,123.767 39.98,125.24 40.081,126.205 cw(c40.818,126.205) 40.818,126.942 41.275,126.942 134.315,126.942 cw(c134.315,126.103) 135.153,126.103 135.433,124.452 136.093,122.522 136.83,121.354 137.82,120.084 138.989,118.991 140.386,118.102 142.113,117.34 143.764,117.01 145.313,116.883 148.666,116.883 152.552,116.883 cw(c152.552,114.343) 155.092,114.343 155.092,114.038 155.092,27.653 cw(c152.552,27.653) 152.552,25.113 151.689,25.113 150.8,25.113 ccw(c150.8,22.827) 148.514,22.827 cw(c147.193,22.827) 147.193,21.506 146.025,21.506 144.297,21.506

## Keep-outs
Keep-Out Layer:
  circle w0.254: c150.417,94.812 r1.6
  circle w0.254: c24.817,94.812 r1.6
  circle w0.254: c150.417,70.812 r1.6
  circle w0.254: c67.617,104.612 r1.6
  circle w0.254: c107.617,104.612 r1.6
  circle w0.254: c59.617,60.712 r1.6
  circle w0.254: c115.617,60.712 r1.6
  circle w0.254: c159,121 r1.8
  circle w0.254: c171.5,118 r1.55
  circle w0.254: c159,7 r1.8
  circle w0.254: c83,7 r1.8
  circle w0.254: c17,121 r1.8
  circle w0.254: c4.5,11 r1.55
  circle w0.254: c17,7 r1.8
  lines w0.254: 0,124.943 0,125.73 cw(c1.27,125.73) 1.27,127 2.032,127 ; 0,125 0,1.27 ccw(c1.27,1.27) 1.27,0 174.77,0 ; 2,127 174.793,127 ; 174.732,0 ccw(c174.732,1.27) 176.002,1.27 ; 174.734,127 cw(c174.734,125.73) 176.004,125.73 ; 176,1.285 176,125.712

## Other copper
Top Layer:
  rectangle net GND: 40.496,70.44 40.852,70.72
  region net GND: 40.818,69.805 41.186,70.173 40.678,70.681 40.31,70.313
  region net NetC3_2: 46.999,71.151 47.659,71.812 46.961,72.51 46.3,71.85
  rectangle net NetC3_2: 46.541,72.117 47.049,72.548
  region net NetC3_2: 46.717,72.369 46.897,72.548 46.681,72.764 46.502,72.584
  rectangle net NetR7_2: 30.489,74.149 30.844,74.834
  rectangle net NetR7_2: 30.844,74.428 30.997,74.834
  rectangle net NetR7_2: 30.997,74.606 31.225,74.834
  region net GND: 117.514,88.969 117.717,89.173 117.319,89.571 117.116,89.368
  rectangle net GND: 117.273,89.312 117.552,89.693
  region net VCC3V3: 101.019,34.426 101.296,34.702 100.915,35.083 100.638,34.807
  rectangle net VCC3V3: 100.763,34.423 100.991,34.626
  rectangle net VCC3V3: 102.387,43.77 103.683,44.304
  region net VCC3V3: 102.372,43.679 102.641,43.948 102.426,44.164 102.156,43.894
  rectangle net VCC3V3: 100.889,45.421 101.879,45.853
  rectangle net VCC3V3: 100.838,45.04 101.422,45.472
  region net VCC3V3: 101.172,45.57 101.299,45.697 100.927,46.069 100.8,45.942
  region net VCC3V3: 97.183,42.599 97.45,42.866 97.206,43.11 96.939,42.843
  pour cut-out: 131.496,73.348 131.496,76.853 cw(c132.055,76.853) 132.055,77.412 151.536,77.412 cw(c151.536,76.904) 152.044,76.904 152.044,49.37 cw(c151.562,49.37) 151.562,48.887 132.182,48.887 cw(c132.182,49.624) 131.445,49.624
  region net VCC3V3: 113.817,32.885 113.97,32.733 114.402,32.733 114.402,32.657 113.386,31.641 113.259,31.844 113.335,32.733
  region net VCC: 133.502,110.559 134.696,109.365 134.696,109.009 133.502,109.009 133.426,108.933
  region net VCC: 136.398,108.958 136.982,108.374 136.982,107.536 138.227,108.781
Bottom Layer:
  region net GND: 34.62,78.732 34.976,79.088 34.63,79.433 34.275,79.078
  region net GND: 32.055,73.691 32.69,74.326 32.258,74.758 31.623,74.123
  rectangle net GND: 32.063,74.555 32.571,75.292
  rectangle net GND: 32.614,74.555 34.544,75.419
  rectangle net NetS1_1: 32.69,70.897 34.569,71.659
  rectangle net GND: 95.961,43.034 96.418,43.364
  pour cut-out: 131.496,76.37 131.496,76.878 cw(c132.029,76.878) 132.029,77.412 151.536,77.412 cw(c151.536,76.827) 152.121,76.827 152.121,49.395 cw(c151.562,49.395) 151.562,48.837 132.004,48.837 cw(c132.004,49.395) 131.445,49.395
  region net GND: 109.728,125.773 110.82,124.935 111.023,124.935 112.116,126.027 109.626,126.027 109.423,125.9

## Silkscreen, mask and mechanical layers (free items; w line width, h text height)
Top Overlay:
  circle w0.254: c17,121 r3
  circle w0.254: c159,121 r3
  circle w0.254: c159,7 r3
  circle w0.254: c83,7 r3
  circle w0.254: c17,7 r3
  lines w0.13: 45.974,44.061 62.636,44.061 62.636,44.036 ; 45.999,40.124 62.611,40.124 62.611,40.175 ; 45.999,42.182 62.636,42.182 62.636,42.207 ; 51.003,38.321 51.003,45.941 ; 56.667,38.321 56.667,45.941 56.769,45.941 ; 45.999,38.296 45.999,45.966 62.636,45.966 62.636,38.296 45.999,38.296
  text "F103 reset" at 112.09,67.175 h0.76
  text "BOOT1" at 46.838,44.646 h0.8
  text "BOOT0" at 52.045,44.646 h0.8
  text "0" at 47.904,42.715 h0.8
  text "X" at 52.705,42.715 h0.8
  text "FLASH" at 57.302,42.69 h0.8
  text "1" at 48.057,40.734 h0.8
  text "1" at 52.883,40.734 h0.8
  text "SRAM" at 57.277,40.734 h0.8
  text "ISP" at 57.277,38.753 h0.8
  text "0" at 48.057,38.727 h0.8
  text "1" at 52.807,38.702 h0.8
  text "JTAG" at 135.23,37.889 h0.76

## Dimensions
0,125 to 176,125.712 on Keep-Out Layer
2,127 to 1.27,0 on Keep-Out Layer

## Text inside footprints (layer, text, board x,y; h text height)
J1: Top Overlay "9" at 50.546,116.909 h0.89; Top Overlay "5" at 49.784,113.607 h0.89; Top Overlay "6" at 63.881,116.909 h0.89; Top Overlay "1" at 64.516,113.607 h0.89
P2: Top Overlay "8" at 78.97,44.304 h0.76 r270; Top Overlay "7" at 76.43,44.304 h0.76 r270; Top Overlay "1" at 76.557,55.226 h0.76 r270; Top Overlay "2" at 79.351,55.48 h0.76 r270
P10: Top Overlay "2" at 89.332,101.44 h1.27; Top Overlay "1" at 89.306,98.595 h1.27; Top Overlay "7" at 101.016,98.9 h1.27; Top Overlay "8" at 101.016,101.44 h1.27
U1: Top Overlay "VPP" at 44.789,83.597 h0.76; Top Overlay "IO" at 45.23,86.02 h0.76; Top Overlay "RESET" at 25.139,83.826 h0.76; Top Overlay "VCC" at 25.393,81.032 h0.76; Top Overlay "CLK" at 25.012,86.493 h0.76; Top Overlay "GND" at 44.916,81.438 h0.76